# EAGLE board Domino (EAGLE 6.5.0)

No outline drawn. Coordinates in mm, seen from the top.
Copper layers (1*16): Top 0.035mm / dielectric 1.5mm / Bottom 0.035mm
Design rules "default": minimum track width 10mil, minimum drill 24mil, track to track 8mil, track to pad 8mil, pad to pad 8mil, via to via 8mil, smd to smd 8mil, copper to edge 40mil, drill to drill 8mil, minimum pad ring 10mil, minimum via ring 8mil, stop-mask expansion 4mil, vias tented up to drill 0mil, thermal gap 10mil

## Footprints (pad centres in the part's own frame; a part is rotated, then mirrored left to right if it is on the bottom)
DOMINO = smd 1.7 x 1.7: 1 -12.5,20.5; 21 -12.5,-20.5; 33 12.5,-20.5; 53 12.5,20.5 | smd 1.7 x 0.9: 2 -12.5,18; 3 -12.5,16; 4 -12.5,14; 5 -12.5,12; 6 -12.5,10; 7 -12.5,8; 8 -12.5,6; 9 -12.5,4; 10 -12.5,2; 11 -12.5,0; 12 -12.5,-2; 13 -12.5,-4; 14 -12.5,-6; 15 -12.5,-8; 16 -12.5,-10; 17 -12.5,-12; 18 -12.5,-14; 19 -12.5,-16; 20 -12.5,-18; 34 12.5,-18; 35 12.5,-16; 36 12.5,-14; 37 12.5,-12; 38 12.5,-10; 39 12.5,-8; 40 12.5,-6; 41 12.5,-4; 42 12.5,-2; 43 12.5,0; 44 12.5,2; 45 12.5,4; 46 12.5,6; 47 12.5,8; 48 12.5,10; 49 12.5,12; 50 12.5,14; 51 12.5,16; 52 12.5,18 | smd 0.9 x 1.7: 22 -10,-20.5; 23 -8,-20.5; 24 -6,-20.5; 25 -4,-20.5; 26 -2,-20.5; 27 0,-20.5; 28 2,-20.5; 29 4,-20.5; 30 6,-20.5; 31 8,-20.5; 32 10,-20.5; 54 10,20.5; 55 8,20.5; 56 6,20.5; 57 4,20.5; 58 2,20.5; 59 0,20.5; 60 -2,20.5; 61 -4,20.5; 62 -6,20.5; 63 -8,20.5; 64 -10,20.5 | smd 0.7 x 0.7: TP1 -11,12; TP2 -11,8; TP3 -11,6; TP4 -11,4; TP5 -11,2; TP6 -11,-18; TP7 -10,-19; TP8 -8,-19; TP9 -6,-19; TP10 -4,-19; TP11 -2,-19; TP12 2,-19; TP13 11,-8; TP14 11,-6; TP15 11,-4; TP16 11,-2; TP17 11,0; TP18 11,2; TP19 11,4; TP20 11,6; TP21 11,8; TP22 11,12; TP23 11,14; TP24 11,16; TP25 11,18; TP26 6,19; TP27 4,19
DRMLF164 = smd 0.52 x 0.24: A3 -5.869,4.25; A4 -5.869,3.75; A5 -5.869,3.25; A6 -5.869,2.75; A7 -5.869,2.25; A8 -5.869,1.75; A9 -5.869,1.25; A10 -5.869,0.75; A11 -5.869,0.25; A12 -5.869,-0.25; A13 -5.869,-0.75; A14 -5.869,-1.25; A15 -5.869,-1.75; A16 -5.869,-2.25; A17 -5.869,-2.75; A18 -5.869,-3.25; A19 -5.869,-3.75; A20 -5.869,-4.25; A47 5.869,-4.25; A48 5.869,-3.75; A49 5.869,-3.25; A50 5.869,-2.75; A51 5.869,-2.25; A52 5.869,-1.75; A53 5.869,-1.25; A54 5.869,-0.75; A55 5.869,-0.25; A56 5.869,0.25; A57 5.869,0.75; A58 5.869,1.25; A59 5.869,1.75; A60 5.869,2.25; A61 5.869,2.75; A62 5.869,3.25; A63 5.869,3.75; A64 5.869,4.25; A65 5.869,4.75; B1 -5.119,4.5; B2 -5.119,4; B3 -5.119,3.5; B4 -5.119,3; B5 -5.119,2.5; B6 -5.119,2; B7 -5.119,1.5; B8 -5.119,1; B9 -5.119,0.5; B10 -5.119,0; B11 -5.119,-0.5; B12 -5.119,-1; B13 -5.119,-1.5; B14 -5.119,-2; B15 -5.119,-2.5; B16 -5.119,-3; B17 -5.119,-3.5; B18 -5.119,-4; B19 -5.119,-4.5; B39 5.119,-4.5; B40 5.119,-4; B41 5.119,-3.5; B42 5.119,-3; B43 5.119,-2.5; B44 5.119,-2; B45 5.119,-1.5; B46 5.119,-1; B47 5.119,-0.5; B48 5.119,0; B49 5.119,0.5; B50 5.119,1; B51 5.119,1.5; B52 5.119,2; B53 5.119,2.5; B54 5.119,3; B55 5.119,3.5; B56 5.119,4 | smd 0.24 x 0.52: A25 -4.25,-5.869; A26 -3.75,-5.869; A27 -3.25,-5.869; A28 -2.75,-5.869; A29 -2.25,-5.869; A30 -1.75,-5.869; A31 -1.25,-5.869; A32 -0.75,-5.869; A33 -0.25,-5.869; A34 0.25,-5.869; A35 0.75,-5.869; A36 1.25,-5.869; A37 1.75,-5.869; A38 2.25,-5.869; A39 2.75,-5.869; A40 3.25,-5.869; A41 3.75,-5.869; A42 4.25,-5.869; A68 4.75,5.869; A69 4.25,5.869; A70 3.75,5.869; A71 3.25,5.869; A72 2.75,5.869; A73 2.25,5.869; A74 1.75,5.869; A75 1.25,5.869; A76 0.75,5.869; A77 0.25,5.869; A78 -0.25,5.869; A79 -0.75,5.869; A80 -1.25,5.869; A81 -1.75,5.869; A82 -2.25,5.869; A83 -2.75,5.869; A84 -3.25,5.869; A85 -3.75,5.869; A86 -4.25,5.869; B20 -4.5,-5.119; B21 -4,-5.119; B22 -3.5,-5.119; B23 -3,-5.119; B24 -2.5,-5.119; B25 -2,-5.119; B26 -1.5,-5.119; B27 -1,-5.119; B28 -0.5,-5.119; B29 0,-5.119; B30 0.5,-5.119; B31 1,-5.119; B32 1.5,-5.119; B33 2,-5.119; B34 2.5,-5.119; B35 3,-5.119; B36 3.5,-5.119; B37 4,-5.119; B38 4.5,-5.119; B59 4,5.119; B60 3.5,5.119; B61 3,5.119; B62 2.5,5.119; B63 2,5.119; B64 1.5,5.119; B65 1,5.119; B66 0.5,5.119; B67 0,5.119; B68 -0.5,5.119; B69 -1,5.119; B70 -1.5,5.119; B71 -2,5.119; B72 -2.5,5.119; B73 -3,5.119; B74 -3.5,5.119; B75 -4,5.119; B76 -4.5,5.119 | drill 1.5: PAD 0,0

## Placement (x,y rotation side)
M1  DOMINO  [DOMINO]  15,22 0 top
U1  AR9331-AL1A  [DRMLF164]  15.8,21.9 90 top

## Library data of the parts
M1 U1 = Domino

## Nets
!RESET_L: M1.5 U1.A72
+2.5VD_OUT: M1.25 M1.TP9
+2VA_ETH_OUT: M1.43 M1.TP17
+3.3VD_FLASH_IN: M1.26 M1.TP9
+3.3VD_IN: M1.27 M1.28
ANT0: M1.63 U1.A65
ELD2: M1.18
FLASH_WP: M1.54
GPIO24: M1.30 U1.A29
I2S_CK: M1.37 U1.A28
I2S_MCK: M1.34 U1.B25
I2S_MICIN: M1.32 U1.B24
I2S_SD: M1.35 U1.A27
I2S_WS: M1.36 U1.B23
JTAG_TCK: M1.8 U1.A53
JTAG_TDI: M1.9 U1.B46
JTAG_TDO: M1.10 U1.A54
JTAG_TMS: M1.7 U1.A52
LED0: M1.20 U1.A78
LED1: M1.19 U1.A77
LED2: U1.B66
LED3: M1.17 U1.A76
LED4: M1.16 U1.B65
LED5: M1.15 U1.A75
LED6: M1.14 U1.B64
LED7: M1.13 U1.B44
LED8: M1.12 U1.A51
P0_RX+: M1.44 U1.A41
P0_RX-: M1.45 U1.B37
P0_TX+: M1.46 U1.A42
P0_TX-: M1.47 U1.B38
P4_RX+: M1.39 U1.A31
P4_RX-: M1.40 U1.B27
P4_TX+: M1.41 U1.A32
P4_TX-: M1.42 U1.B28
SPDIF_OUT: M1.31 U1.B22
SPI_CLK: M1.49 U1.B51
SPI_CS: M1.51 U1.B49
SPI_MISO: M1.52 U1.B50
SPI_MOSI: M1.50 U1.A57
UART_CTS: M1.60 U1.A56
UART_RTS: M1.59 U1.B48
UART_RX: M1.22 U1.B68
UART_TX: M1.23 U1.A79
USB+: M1.57 U1.B43
USB-: M1.56 U1.A50
XLNA: U1.A74

## Tracks (layer width: path | path; a pad name or v marks a point on that pad's centre or on a via)
!RESET_L  (1 unrouted)
+2.5VD_OUT  (1 unrouted)
+2VA_ETH_OUT  (1 unrouted)
+3.3VD_FLASH_IN  (1 unrouted)
+3.3VD_IN  (1 unrouted)
ANT0  (1 unrouted)
GPIO24  (1 unrouted)
I2S_CK  (1 unrouted)
I2S_MCK  (1 unrouted)
I2S_MICIN  (1 unrouted)
I2S_SD  (1 unrouted)
I2S_WS  (1 unrouted)
JTAG_TCK  (1 unrouted)
JTAG_TDI  (1 unrouted)
JTAG_TDO  (1 unrouted)
JTAG_TMS  (1 unrouted)
LED0  (1 unrouted)
LED1  (1 unrouted)
LED3  (1 unrouted)
LED4  (1 unrouted)
LED5  (1 unrouted)
LED6  (1 unrouted)
LED7  (1 unrouted)
LED8  (1 unrouted)
P0_RX+  (1 unrouted)
P0_RX-  (1 unrouted)
P0_TX+  (1 unrouted)
P0_TX-  (1 unrouted)
P4_RX+  (1 unrouted)
P4_RX-  (1 unrouted)
P4_TX+  (1 unrouted)
P4_TX-  (1 unrouted)
SPDIF_OUT  (1 unrouted)
SPI_CLK  (1 unrouted)
SPI_CS  (1 unrouted)
SPI_MISO  (1 unrouted)
SPI_MOSI  (1 unrouted)
UART_CTS  (1 unrouted)
UART_RTS  (1 unrouted)
UART_RX  (1 unrouted)
UART_TX  (1 unrouted)
USB+  (1 unrouted)
USB-  (1 unrouted)